# Altium PCB PCB_TX.PcbDoc
Units mm, origin at the board's own origin, x right, y up, seen from the top; angles counter-clockwise.
Board outline 85 x 54.6 mm, 2 copper layers (Top Layer, Bottom Layer); 48 components, 26 nets, 175 pads, 61 vias.
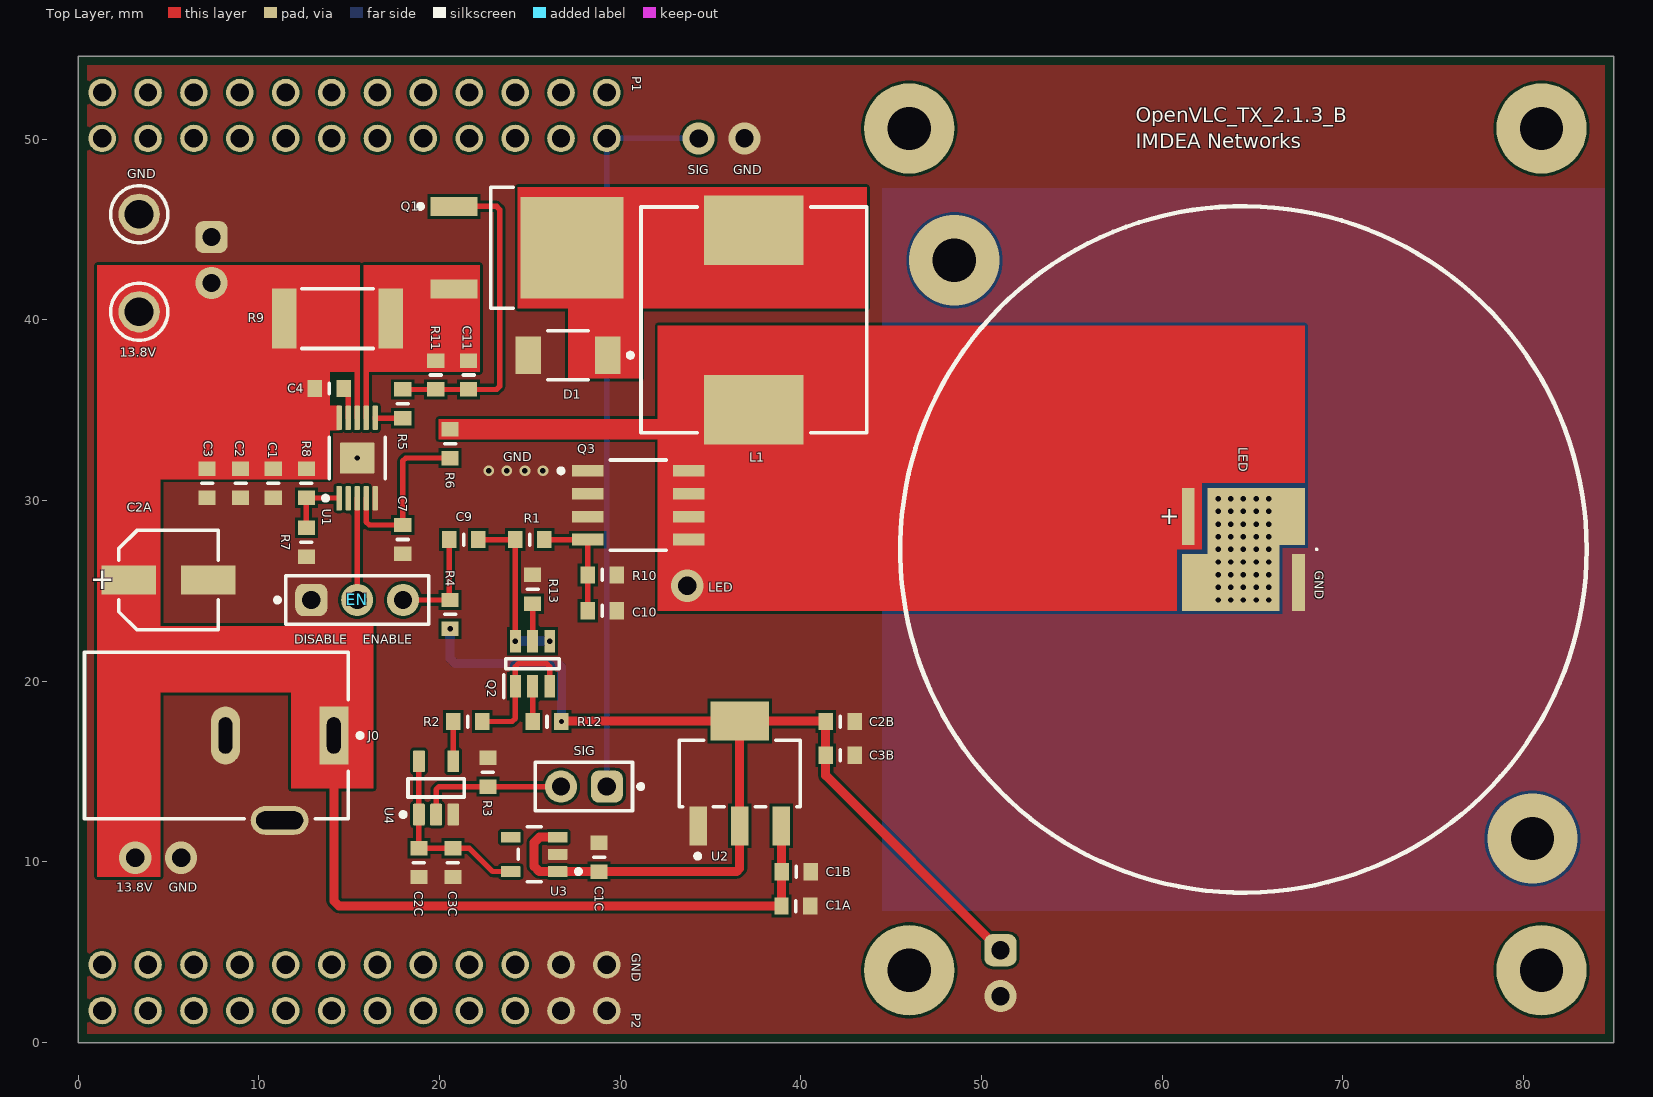
[diagram p0: Top Layer view]
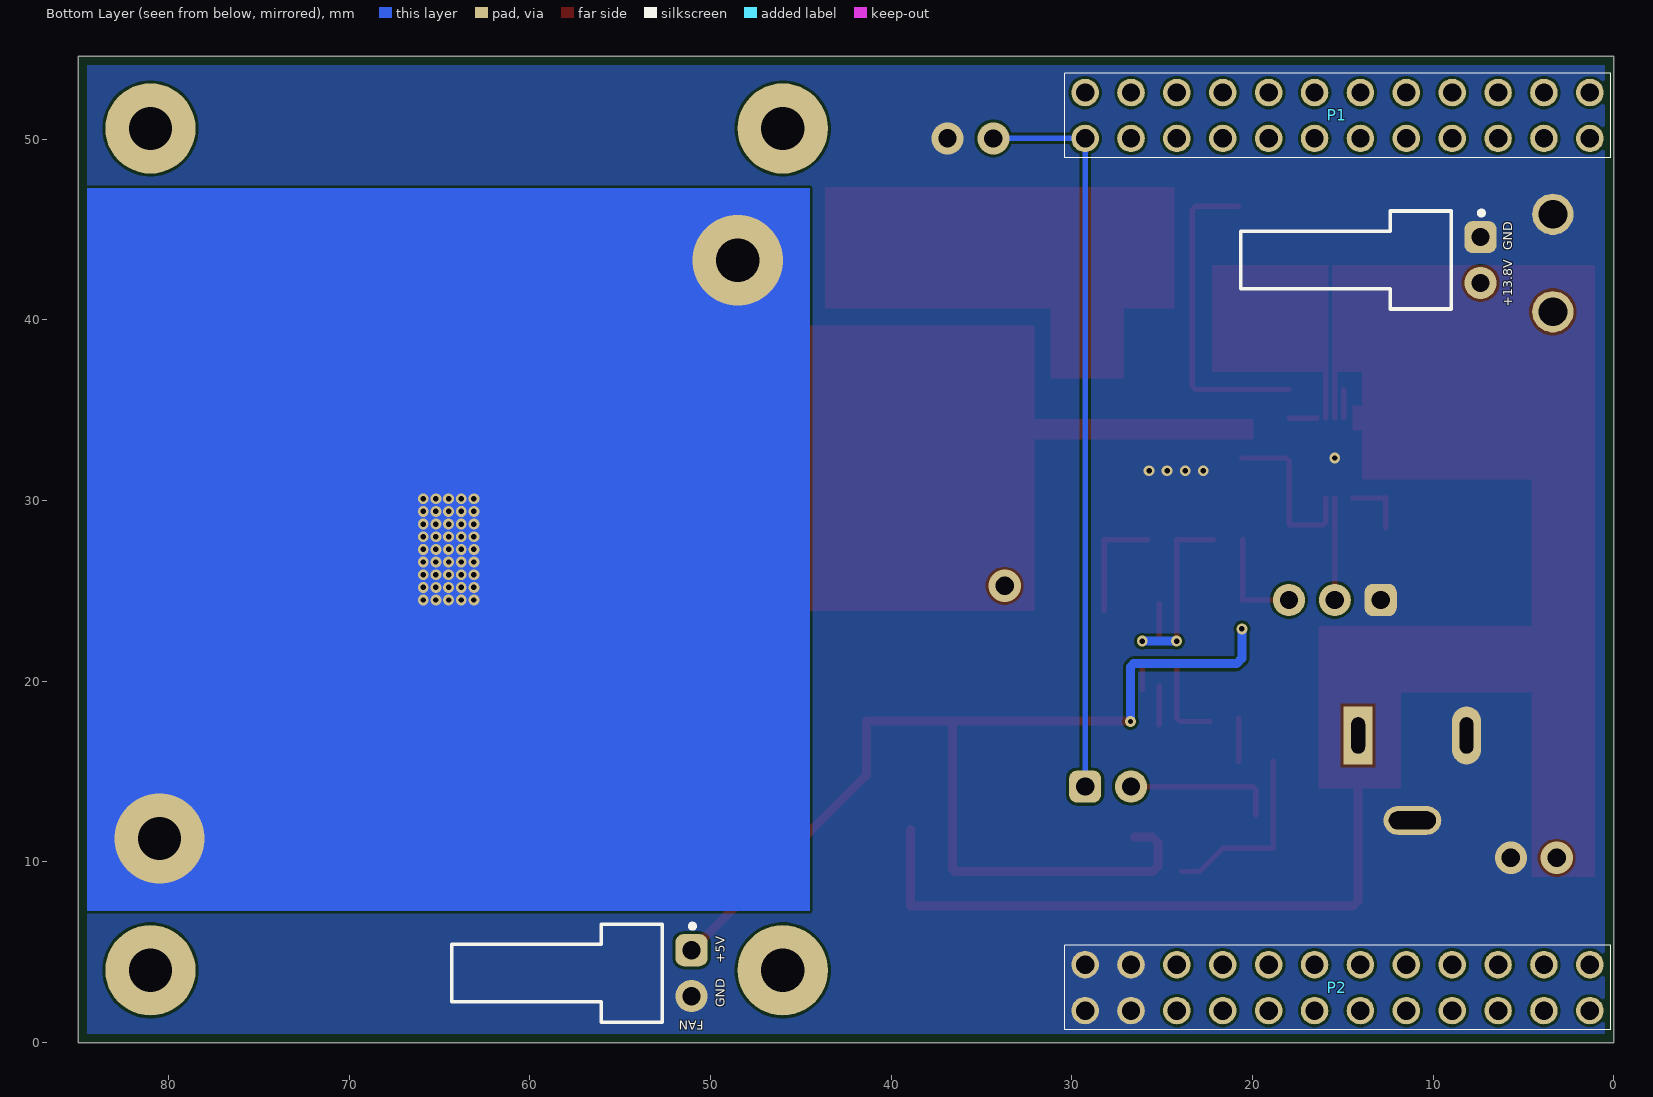
[diagram p1: Bottom Layer view, seen from below]

## Layer stack, top to bottom
Top Solder: solder mask 0.0102, Solder Resist, Dk 3.5
Top Layer: signal copper 0.07
Dielectric1: dielectric 0.32, FR-4, Dk 4.8
Bottom Layer: signal copper 0.07
Bottom Solder: solder mask 0.0102, Solder Resist, Dk 3.5

## Board outline
0,0 0,54.6 85,54.6 85,0

## Design rules (kind name [scope] priority, off if disabled: settings)
Clearance Clearance_1 [(InNet('GND') AND InComponent('DC-DC'))] p1: gap=0.5 ignorepadtopadclearanceinfootprint=FALSE except(0: Arc-Hole Track-Hole SMDPad-Hole THPad-Hole Via-Hole Fill-Hole Poly-Hole Region-Hole Text-Hole)
Clearance [All] p2: gap=0.15 ignorepadtopadclearanceinfootprint=FALSE except(0: Arc-Hole Track-Hole SMDPad-Hole THPad-Hole Via-Hole Fill-Hole Poly-Hole Region-Hole Text-Hole)
DiffPairsRouting [All] p1: maxlimit=0.3 minlimit=0.3 mostfreqgap=0.3 toplayer_minwidth=0.381 toplayer_maxwidth=0.381 toplayer_prefwidth=0.381 bottomlayer_minwidth=0.381 bottomlayer_maxwidth=0.381 bottomlayer_prefwidth=0.381 maxuncoupledlength=12.7
HoleSize [All] p1: absolutevalues=TRUE maxlimit=2.54 minlimit=0.25 maxpercent=80.000 minpercent=20.000
MinimumSolderMaskSliver [All] p1: minsoldermaskwidth=0.15
PlaneClearance [All] p1: clearance=0.5
PlaneConnect [All] p1: planeconnectstyle=Direct reliefexpansion=0.508 reliefentries=4 reliefconductorwidth=0.254 reliefairgap=0.254
PolygonConnect PolygonConnect_1 [IsVia & InNet('GND')] p1: connectstyle=Direct reliefconductorwidth=0.254 reliefentries=4 polygonreliefangle="90 Angle" airgapwidth=0
PolygonConnect [All] p2: connectstyle=Direct reliefconductorwidth=0.254 reliefentries=4 polygonreliefangle="90 Angle" airgapwidth=0.254
RoutingVias [All] p1: holewidth=0.711 width=1.27 viastyle="Through Hole" minholewidth=25 minwidth=0.55 maxholewidth=0.711 maxwidth=1.27
SMDNeckDown [All] p1: percent=80.000
SilkToSilkClearance [All] p1: silktosilkclearance=0.15
SilkToSolderMaskClearance [IsPad] p1: minsilkscreentomaskgap=0.15 clearancetoexposedcopper=TRUE
SolderMaskExpansion [All] p1: expansion=0.102 istentingtop=FALSE
SupplyNets "Schematic Supply Nets_1" [InNet('+13.8V')] p1: voltage=0.000
SupplyNets "Schematic Supply Nets_5" [InNet('+5V')] p2: voltage=0.000
SupplyNets "Schematic Supply Nets_2" [InNet('+3.3V')] p3: voltage=0.000
SupplyNets "Schematic Supply Nets" [InNet('GND')] p4: voltage=0.000
Width [All] p1: maxlimit=0.5 minlimit=0.15 preferedwidth=0.3 minimp=50.000000 maximp=50.000000 favimp=50.000000
23 further rules are at their usual default settings.

## Components (designator, comment, footprint, x,y, rotation, side; value= is the part's Value field where it differs from the comment)
13.8V "5010" KSTN-5010_V 3.376,40.453 r90 top
+13.8V "61900211021" 61900211021 -1255.173,-1226.681 r270 bottom
C1 "GRM188R6YA106MA73D" RESC1608X55N 10.797,30.957 r270 top value=10uF
C1A "GRM188R6YA106MA73D" RESC1608X55N 39.729,7.556 r0 top value=10uF
C1B "GRM188R6YA475KE15D" RESC1608X55N 39.748,9.459 r180 top value=4.7uF
C1C "GRM188R6YA475KE15D" RESC1608X55N 28.833,10.268 r270 top value=4.7uF
C2 "GRM188R6YA475KE15D" RESC1608X55N 8.988,30.957 r270 top value=4.7uF
C2A "EEH-ZL1E820R" WCAP-PSLP_D5H5.5 5,25.6 r180 top
C2B "GRM188R6YA106MA73D" RESC1608X55N 42.173,17.772 r180 top value=10uF
C2C "GRM188R6YA106MA73D" RESC1608X55N 18.858,9.965 r90 top value=10uF
C3 "GCM188R71H104KA57J" RESC1608X55N 7.138,30.957 r270 top value=100nF
C3B "GCM188R71H104KA57J" RESC1608X55N 42.173,15.907 r0 top value=100nF
C3C "GCM188R71H104KA57J" RESC1608X55N 20.743,9.965 r270 top value=100nF
C4 "GCM188D71H105KE36J" RESC1608X55N 13.892,36.207 r0 top value=1uF
C7 "GCM1885C1H471JA16D" RESC1608X55N 17.963,27.85 r270 top value=470pF
C9 "GRM1885C1H102JA01D" RESC1608X55N 21.342,27.842 r0 top value=1nF
C10 "GCM1885C1H471JA16D" RESC1608X55N 29,23.904 r0 top value=470pF
C11 "GCM1885C1H471JA16D" RESC1608X55N 21.607,36.952 r270 top value=470pF
D1 "PMEG3050EP,115" FP-SOD128-MFG 27.113,38.047 r180 top
EN "61300311121" 61300311121 15.442,24.5 r0 top
FAN "61900211021" 61900211021 -1211.5,-1266.156 r270 bottom
GND "5011" KSTN-5011_V 3.376,45.85 r90 top
J0 "PJ-102A" FP-PJ-102A-MFG 7.65,17 r90 top
L1 "SLF12575T-330M3R2-PF" EATN-DR125_V 37.403,40 r270 top
LED "XHP70D-00-0000-0D0BN20E7" XHP70DH000000D0HN20E3_12 64.5,27.3 r180 top
P1 "61302421121" BBB_CAPE_NO_HEADER_R_24 57.204,50.049 r0 bottom
P2 "61302421121" BBB_CAPE_NO_HEADER_R_24 57.205,1.771 r0 bottom
Q1 "ZXMP7A17KTC" DIOD-TO252-3_V 24.842,44 r0 top
Q2 "FDC6333C" SOT95P275X110-6N 25.15,20.972 r90 top
Q3 "DMT67M8LSS-13" FP-751EB-MFG 31,29.747 r0 top
R1 "RT0603BRD0710RL" RESC1608X55N 25,27.842 r180 top value=10
R2 "RT0603BRD071RL" RESC1608X55N 21.558,17.772 r180 top value=1
R3 "RT0603BRD0710KL" RESC1608X55N 22.679,14.972 r90 top value=10k
R4 "RT0603BRD07100RL" RESC1608X55N 20.582,23.7 r270 top value=100
R5 "RT0603BRD071RL" RESC1608X55N 17.963,35.352 r270 top value=1
R6 "RT0603BRD073K9L" RESC1608X55N 20.582,33.157 r90 top value=3900
R7 "RT0603BRD0716K5L" RESC1608X55N 12.634,27.688 r270 top value=16.5k
R8 "RT0603BRD0749K9L" RESC1608X55N 12.634,30.957 r270 top value=49.9k
R9 "CRA2512-FZ-R075ELF" FP-CSRN2512-IPC_B 14.349,40.075 r0 top
R10 "RT0603BRD0710KL" RESC1608X55N 29,25.886 r0 top value=10k
R11 "RT0603BRD0710KL" RESC1608X55N 19.79,36.952 r270 top value=10k
R12 "RT0603BRD0710RL" RESC1608X55N 25.95,17.772 r0 top value=10
R13 "RT0603BRD0710RL" RESC1608X55N 25.15,25.086 r90 top value=10
SIG "61300211121" 61300211121 27.995,14.172 r180 top
U1 "LM3409QMY/NOPB" DGQ0010A_N 15.442,32.357 r90 top
U2 "TLV76150DCYR" FP-DCY0004A-MFG 36.618,14.896 r90 top
U3 "TPS7A2433DBVR" FP-DBV0005A-MFG 25.241,10.418 r180 top
U4 "SN74AHC1G126DBVR" DBV0005A_M 19.808,14.096 r90 top

## Footprints (in the part's own frame and the unit in brackets; to place one, negate y for a bottom-side part, rotate by r counter-clockwise, add the part's x,y. Pads: shape width x height; smd on the part's side, far side on the other; paste and mask are expansions set on the pad)
61300211121 [mil] "Pin Header, pitch 2.54 mm, THT, Vertical, single row, 2p"
  rrect50% 70x70 hole 40: 1(-50,0)
  round 70 hole 40: 2(50,0)
  silkscreen extent -129,-53 106,53, body extent -100,-50 100,50, height 337
61300311121 [mil] "Pin Header, pitch 2.54 mm, THT, Vertical, single row, 3p"
  rrect50% 70x70 hole 40: 1(-100,0)
  round 70 hole 40: 2(0,0) 3(100,0)
  silkscreen extent -179,-53 156,53, body extent -150,-50 150,50, height 337
61900211021 [mil] "2.54mm Male Left Angled Header Bottom Locking, 2p"
  rrect50% 70x70 hole 40: 1(-50050,-49706.69)
  round 70 hole 40: 2(-49950,-49706.69)
  silkscreen extent -50107,-50229 -49893,-49700, body extent -50100,-50226 -49900,-49694, height 230
BBB_CAPE_NO_HEADER_R_24 [mil] "46-pin male header for BeagleBone Black P8,P9"
  round 60 hole 40: 23(-1100,0) 24(-1100,-100) 25(-1200,0) 26(-1200,-100) 27(-1300,0) 28(-1300,-100) 29(-1400,0) 30(-1400,-100) 31(-1500,0) 32(-1500,-100) 33(-1600,0) 34(-1600,-100) 35(-1700,0) 36(-1700,-100) 37(-1800,0) 38(-1800,-100) 39(-1900,0) 40(-1900,-100) 41(-2000,0) 42(-2000,-100) 43(-2100,0) 44(-2100,-100) 45(-2200,0) 46(-2200,-100)
  silkscreen extent -2246,-142 -1056,42
DBV0005A_M [mm] "SOT23, 5-Leads, Body 3.05x1.75mm, Pitch 0.95mm, IPC Low Density"
  rrect15% 1.2x0.65 smd: 1(-1.475,0.95) 2(-1.475,0) 3(-1.475,-0.95) 4(1.475,-0.95) 5(1.475,0.95)
  silkscreen extent -1.6,-1.55 0.5,1.95, body extent -1.42,-1.46 1.42,1.46, height 1.08
DGQ0010A_N [mm] "TSOP, 10-Leads, Body 3.1x3.1mm, Pitch 0.5mm, Thermal Pad 1.9x1.73mm, IPC Medium Density"
  rrect33% 1.35x0.3 smd: 1(-2.225,1) 2(-2.225,0.5) 3(-2.225,0) 4(-2.225,-0.5) 5(-2.225,-1) 6(2.225,-1) 7(2.225,-0.5) 8(2.225,0) 9(2.225,0.5) 10(2.225,1)
  rrect6% 1.73x1.9 smd: 11(0,0)
  silkscreen extent -2.35,-1.55 1.15,1.87, body extent -2.45,-1.5 2.45,1.5, height 0.94
DIOD-TO252-3_V [mm] "DPAK, 3-Leads, Body 6.7x6.2mm, Pitch 2.286mm"
  rect 2.6x1.06 smd: 1(-4.05,2.286) 2(-4.05,-2.286)
  rect 5.7x5.632 smd: 3(2.5,0)
  silkscreen extent -6.02,-3.35 -0.75,3.35, body extent -4.63,-3.35 5.28,3.35, height 2.39
EATN-DR125_V [mm] "SMD, 2-Leads, Body 12.5x12.5mm"
  rect 3.85x5.5 smd: 1(-4.975,0) 2(4.975,0)
  silkscreen extent -6.25,-6.25 6.25,6.25, body extent -6.25,-6.25 6.25,6.25, height 6
FP-751EB-MFG [mm]
  rect 1.75x0.65 smd paste+0 mask+0: 1(-2.8,1.905) 2(-2.8,0.635) 3(-2.8,-0.635) 4(-2.8,-1.905) 5(2.8,-1.905) 6(2.8,-0.635) 7(2.8,0.635) 8(2.8,1.905)
  silkscreen extent -4.4,-2.5 1.55,2.5, body extent -3.77,-2.6 3.77,2.6, height 0.25
FP-CSRN2512-IPC_B [mm]
  rect 1.355x3.308 smd paste+0 mask+0: 1(-2.951,0) 2(2.951,0)
  silkscreen extent -1.97,-1.65 1.97,1.65, body extent -3.88,-1.9 3.88,1.9, height 0.25
FP-DBV0005A-MFG [mm]
  rrect17% 1.1x0.6 smd paste+0 mask+0: 1(-1.3,0.95) 2(-1.3,0) 3(-1.3,-0.95) 4(1.3,-0.95) 5(1.3,0.95)
  silkscreen extent -2.58,-1.53 0.87,1.53, body extent -1.95,-1.78 1.95,1.78, height 0.25
FP-DCY0004A-MFG [mm]
  rect 2.15x0.95 smd paste+0 mask+0: 1(-2.9,2.3) 2(-2.9,0) 3(-2.9,-2.3)
  rect 2.15x3.25 smd paste+0 mask+0: 4(2.9,0)
  silkscreen extent -4.7,-3.35 1.85,3.35, body extent -4.08,-3.45 4.08,3.45, height 0.25
FP-PJ-102A-MFG [mm]
  rect 3.2x1.6 hole 0.762 slot 2 at 0 deg paste-2539.97 mask+0: 1(0,-6.5)
  rrect100% 3.2x1.6 hole 0.762 slot 2 at 0 deg paste-2539.97 mask+0: 2(0,-0.5)
  rrect100% 1.6x3.2 hole 2.6 slot 1 at 0 deg paste-2539.97 mask+0: 3(-4.7,-3.5)
  silkscreen extent -4.6,-8.08 4.6,7.3, body extent -5.6,-7.4 4.7,7.4, height 0.25
FP-SOD128-MFG [mm]
  rect 1.4x2.1 smd paste-1000 mask+0: 1(-2.2,0) 2(2.2,0)
  silkscreen extent -3.58,-1.35 1.12,1.35, body extent -3.1,-1.7 3.1,1.7, height 0.25
KSTN-5010_V [mil] "Test Point, Dia 3.17mm"
  round 90 hole 62.99: 1(0,0)
  silkscreen extent -62,-62 62,62, body extent -62,-62 63,63, height 320
KSTN-5011_V [mil] "Test Point, Dia 3.17mm"
  round 90 hole 62.99: 1(0,0)
  silkscreen extent -62,-62 62,62, body extent -62,-62 63,63, height 320
RESC1608X55N [mm]
  rect 0.8x0.95 smd: 1(-0.8,0) 2(0.8,0)
  silkscreen extent 0,-0.3 0,0.3
SOT95P275X110-6N [mm]
  rect 1.25x0.6 smd: 1(-1.25,0.95) 2(-1.25,0) 3(-1.25,-0.95) 4(1.25,-0.95) 5(1.25,0) 6(1.25,0.95)
  silkscreen extent -1.88,-1.48 0.28,1.6
WCAP-PSLP_D5H5.5 [mm] "Aluminum Polymer Capacitors, body diameter 5mm"
  rect 3x1.6 smd: 1(2.2,0) 2(-2.2,0)
  silkscreen extent -2.75,-2.75 2.75,2.75, body extent -3,-2.65 3,2.65, height 5.5
XHP70DH000000D0HN20E3_12 [mm]
  rect 0.7x3.15 smd: 1(-3.048,1.83) 2(3.048,-1.83)
  rect 1.5x3.15 smd: 3(-2.648,-1.825) 3(2.648,1.825)
  rect 4x6.8 smd: 3(0,0)
  silkscreen extent -4.1,-0.05 -4,0.05

## Part data
13.8V: library part CMP-1672-00002-4, "Test Point, Red, Through Hole, RoHS, Bulk", Colour=Red, Manufacturer=Keystone, Package Quantity=100, ComponentLink1Description="Manufacturer URL", ComponentLink1URL=http://www.keyelco.com/, ComponentLink2Description=Datasheet, ComponentLink2URL=http://www.keyelco.com/product-pdf.cfm?p=1319, Contact Material=Bronze, Contact Plating=Silver, DatasheetVersion="Rev. F, 12/2013", Height="8.12 mm", Mount="Through Hole", Mounting Technology="Through Hole", PackageDescription="1-Pin Through Hole Device, Dia 3.17 mm", PackageReference=5010, Packaging=Bulk, Pins=1, REACH SVHC="No SVHC", RoHSCompliant=true
+13.8V FAN: library part CMP-1502-00592-2, Color=Beige, Contact Resistance=20mΩ, Current Rating=3A, Flammability Rating="UL94 V-0", Insulation Resistance=1GΩ, Max Operating Temperature=105°C, Min Operating Temperature=-40°C, Operating Supply Voltage=250V, Connector Type="Male Pin", Contact Gender=Male, Contact Material=Copper, Contact Mating Length=7.62mm, Contact Plating=Tin, Fastening Type=Friction, Gender=Male, Height=3.2mm, Housing Material=Nylon, Insulation=Insulated, Lead Pitch=2.54mm, Length=5.08mm, Mount="Through Hole", NexarPartId=18818217, Number of Contacts=2, Number of Pins=2, Number of Positions=2, Number of Rows=1, Packaging=Bulk, Pitch=2.54mm, REACH SVHC=Unknown, RoHS=Compliant, Termination="Through Hole", Voltage Rating=250V, Width=5.12mm
C1 C1A C1B C1C C2 C2B C2C C3 C3B C3C C4 C7 C9 C10 C11: library part Cap, "Capacitor", LatestRevisionDate=17-Jul-2002, LatestRevisionNote="Re-released for DXP Platform.", PackageDescription="Radial Cap, Thru-Hole; 2 Leads; 0.3 in Pin Spacing", PackageReference=RAD-0.3, Published=8-Jun-2000, Publisher="Altium Limited"
C2A: library part CMP-03913-53758736-1, "875105242006 WCAP-PSLP Aluminum Polymer Capacitors", Capacitance=47µF, Case/Package=Radial, ESR (Equivalent Series Resistance)=30mΩ, Leakage Current=300µA, Max Operating Temperature=105°C, Min Operating Temperature=-55°C, Ripple Current=1.97A, Tolerance=20%, Voltage Rating=10V, Diameter=5mm, Height - Seated (Max)=5.5118mm, Length=5.5mm, Life (Hours)=2000hours, Mount="Surface Mount", NexarPartId=53758736, Packaging="Tape & Reel (TR)", Pitch=5.3mm, Polarity=Polar, REACH SVHC=Unknown, RoHS=Compliant, Voltage Rating (DC)=10V
D1: library part CMP-14398-000051-1, "DIODE SCHOTTKY 30V 5A SOD128", RoHS Compliant=Yes
EN: library part CMP-1502-01062-3, Color=Black, Contact Resistance=20mΩ, Current Rating=3A, Max Operating Temperature=105°C, Min Operating Temperature=-40°C, Operating Supply Voltage=250V, Connector Type="Male Pin", Contact Material=Copper, Contact Mating Length=5.9944mm, Contact Plating=Gold, Gender=Male, Height=8.94mm, Lead Free="Lead Free", Lead Pitch=2.54mm, Mount="Through Hole", NexarPartId=32855521, Number of Contacts=3, Number of Pins=3, Number of Positions=3, Number of Rows=1, Orientation=Vertical, Packaging=Bulk, Pitch=2.54mm, REACH SVHC=Unknown, RoHS=Compliant, Termination=Solder, Voltage Rating=250V
GND: library part CMP-1672-00003-4, "Test Point, Black, Through Hole, RoHS, Bulk", Colour=Black, Manufacturer=Keystone, Package Quantity=100, ComponentLink1Description="Manufacturer URL", ComponentLink1URL=http://www.keyelco.com/, ComponentLink2Description=Datasheet, ComponentLink2URL=http://www.keyelco.com/product-pdf.cfm?p=1320, Contact Material=Bronze, Contact Plating=Silver, DatasheetVersion="Rev. F, 12/2013", Height="8.12 mm", Mount="Through Hole", Mounting Technology="Through Hole", PackageDescription="1-Pin Through Hole Device, Dia 3.17 mm", PackageReference=5011, Packaging=Bulk, Pins=1, REACH SVHC="No SVHC", RoHSCompliant=true
J0: library part CMP-12637-106234071-1, "PJ-102A 2.0 x 6.5 mm, 2.5 A, Horizontal, Through Hole, Tapered Pins, Dc Power Jack Connector", Color=Black, Current Rating=2.5A, Flammability Rating="UL94 V-0", Insulation Resistance=50MΩ, Max Operating Temperature=85°C, Min Operating Temperature=-25°C, Voltage Rating=24V, Contact Gender=Male, Contact Material="Copper, Nickel, Tin", Contact Plating=Nickel, Diameter=2.1mm, Gender=Male, Height=11.2mm, Housing Color=Black, Housing Material=Thermoplastic, Inside Diameter=2mm, Lead Free="Lead Free", Lifecycle Status=Production, Mount="Through Hole", NexarPartId=106234071, Number of Conductors=2, Number of Contacts=3, Orientation=Horizontal, Outside Diameter=6.5mm, Packaging=Bulk, RoHS=Compliant, Schedule B="8536695050, 8536695050", Shielding=No, Termination="Through Hole", Voltage Rating (DC)=24V
L1: library part CMP-2000-06178-1, "High Power Density, High Efficiency, Shielded Inductor, 100 uH, 1.78 A, -40 to 125 degC, 2-Pin SMD, RoHS, Tape and Reel", Case Size/Dimension=12.5x12.5x6mm, DC Resistance=0.17O, Inductance-Nom=100µH, Manufacturer=EATON, Package Description="2-Pin Surface Mount Device, Body 12.5 x 12.5 mm", Package Reference=DR125, Rated Current-Max=1.78A, Tolerance (%)=±20%, Datasheet URL=https://ciiva.com/datasheet-click-3083294?src=ciiva&sig=4634c5cd, Datasheet Version=04/2014, Manufacturer URL=http://www.eaton.com/, Mounting Technology=SurfaceMount, Shielding=Yes
LED: library part XHP70D-H0-0000-0D0HN20E3, "High Power LEDs - White White 5000 K 80-CRI, XLamp XHP70D", Manufacturer_Name="CREE LED", Mouser Part Number=941-XHP70DH0D0HN20E3, Arrow Part Number=XHP70D-H0-0000-0D0HN20E3, Arrow Price/Stock=https://www.arrow.com/en/products/xhp70d-h0-0000-0d0hn20e3/cree-led?region=nac, Datasheet Link=https://www.mouser.in/datasheet/2/723/ds_XHP70_3-2399964.pdf, Geometry.Height=4.62mm, Manufacturer_Part_Number=XHP70D-H0-0000-0D0HN20E3, Mouser Price/Stock=https://www.mouser.co.uk/ProductDetail/Cree-LED/XHP70D-H0-0000-0D0HN20E3?qs=doiCPypUmgHnzoljhPHltw%3D%3D
P1: library part BBB_P8_reduced
P2: library part BBB_P9_reduced
Q1: library part CMP-1668-00001-5, "P-Channel Enhancement Mode MOSFET, -100 V, -3.8 A, -55 to 150 degC, 3-Pin DPAK (TO252), RoHS, Tape and Reel", Manufacturer="Diodes Inc", Max Operating Temperature="150 degC", Min Operating Temperature="-55 degC", Package Quantity=2500, ComponentLink1Description="Manufacturer URL", ComponentLink1URL=http://www.diodes.com/, ComponentLink2Description=Datasheet, ComponentLink2URL=http://www.diodes.com/_files/datasheets/ZXMP10A18K.pdf, DatasheetVersion="Rev. 2-2, 08/2014", Height="2.39 mm", Length="6.73 mm", Mount="Surface Mount", Mounting Technology="Surface Mount", PackageDescription="3-Pin Transistor Outline, Body 6.1 x 6.575 mm, Pitch 2.286 mm", PackageReference=TO252-3, Packaging="Tape and Reel", Pins=3, REACH SVHC="No SVHC", RoHSCompliant=true
Q2: "High performance trench technology for extremely low RDS(ON); Q2 2.0 A, 30V.; Low gate charge ; Q1 2.5 A, 30V; RDS(on) = 150 m @ VGS = 4.5 V; RDS(on) = 95 m@ VGS = 10 V; RDS(on) = 220 m @ VGS = -4.5 V; SuperSOT 6 package: small footprint (72% smaller thanSO-8); low profile (1mm thick).; RDS(on) = 150 m@ VGS = -10 V", Manufacturer_Name=onsemi, Mouser Part Number=512-FDC6333C, Arrow Part Number=FDC6333C, Arrow Price/Stock=https://www.arrow.com/en/products/fdc6333c/on-semiconductor, Datasheet Link=https://www.onsemi.com/pub/Collateral/FDC6333C-D.PDF, Geometry.Height=1.1mm, Manufacturer_Part_Number=FDC6333C, Mouser Price/Stock=https://www.mouser.co.uk/ProductDetail/onsemi-Fairchild/FDC6333C?qs=UMEuL5FsraAupx2e21YLSQ%3D%3D
Q3: library part CMP-00278-87654981-1, "FDS2672-F085 Trans MOSFET N-CH 200V 3.9A Automotive 8-Pin SOIC T/R", Case/Package=SOIC, Continuous Drain Current (ID)=3.9A, Drain To Source Breakdown Voltage=200V, Drain To Source Resistance=59mΩ, Gate to Source Voltage (Vgs)=20V, Input Capacitance=2.535nF, Manufacturer Lifecycle Status="LAST SHIPMENTS", Max Junction Temperature (Tj)=150°C, Max Power Dissipation=1W, Min Operating Temperature=-55°C, Power Dissipation=2.5W, Drain to Source Voltage (Vdss)=200V, Element Configuration=Single, Fall Time=10ns, Height=1.75mm, Lifecycle Status=EOL, Max Operating Temperature=150°C, Mount="Surface Mount", NexarPartId=87654981, Number of Channels=1, Number of Pins=8, Packaging="Cut Tape (CT)", Radiation Hardening=No, Rds On Max=70mΩ, Rise Time=10ns, RoHS=Compliant, Turn-Off Delay Time=35ns, Turn-On Delay Time=22ns, Weight=230.4mg
R1 R2 R3 R4 R5 R6 R7 R8 R10 R11 R12 R13: library part Res1, "Resistor", LatestRevisionDate=17-Jul-2002, LatestRevisionNote="Re-released for DXP Platform.", PackageDescription="Axial Device, Thru-Hole; 2 Leads; 0.3 in Pin Spacing", PackageReference=AXIAL-0.3, Published=8-Jun-2000, Publisher="Altium Limited"
R9: library part CMP-26527-004947-1, "Res Thick Film 2512 0.1Ω 1% 2W ±200ppm/°C Molded SMD Plastic T/R", Case Code (Imperial)=2512, Case Code (Metric)=6432, Max Operating Temperature=155°C, Max Power Dissipation=2W, Min Operating Temperature=-55°C, Resistance=100mR, Resistor Type="Thick Film", Temperature Coefficient=200ppm/°C, Tolerance=1%, Case/Package=2512, Contact Plating=Tin, Height=0.028inch, Length=0.25inch, Mount="Surface Mount", Number of Terminations=2, Packaging="Tape and Reel", Power Rating=2W, Radiation Hardening=No, RoHS Compliant=Yes, Series=CSRN, Width=0.124inch
SIG: library part CMP-1712-00002-6, Color=Black, Contact Resistance=20mΩ, Current Rating=3A, Max Operating Temperature=125°C, Min Operating Temperature=-40°C, Operating Supply Voltage=250V, Connector Type="Male Pin", Contact Gender=Male, Contact Material=Copper, Contact Mating Length=5.9944mm, Contact Plating=Gold, Gender=Male, Height=8.94mm, Housing Material=PBT, Lead Free="Lead Free", Lead Pitch=2.54mm, Mount="Through Hole", NexarPartId=20081794, Number of Contacts=2, Number of Pins=2, Number of Positions=2, Number of Rows=1, Orientation=Vertical, Packaging=Bulk, Pitch=2.54mm, REACH SVHC="No SVHC", RoHS=Compliant, Termination="Through Hole", Voltage Rating=250V
U1: library part CMP-0063-01360-3, "PFET Buck Controller for High Power LED Drives, 10-pin eMSOP, Pb-Free", Manufacturer="Texas Instruments", PackageTopMarking=ZXTT*SZDB, PowerWise=N, Code_JEDEC=MO-187-BAT, ComponentLink1Description="Datasheet URL", ComponentLink1URL=http://www.ti.com/general/docs/lit/getliterature.tsp?genericPartNumber=LM3409-Q1&fileType=pdf, CompType=MiscPower, PackageDescription="Molded Mini-SO, Exposed Pad .118 x .118 x .034in Body, 10 Lead, .0197in Pitch", PackageReference=DGQ0010A, PinCount=10, RoHS=Y
U2: library part CMP-00370-134324849-1, "TLV76150DCYR 1-A 16-V high-PSRR linear voltage regulator 4-SOT-223 -40 to 125", Case/Package=SOT-223, Dropout Voltage=900mV, Manufacturer Lifecycle Status=ACTIVE, Max Junction Temperature (Tj)=125°C, Max Supply Voltage=16V, Min Operating Temperature=-40°C, Min Supply Voltage=6.5V, Nominal Supply Current=65µA, Output Current=1A, Output Voltage=5V, Accuracy=1%, Height=1.8mm, Length=6.5mm, Lifecycle Status=Production, Max Operating Temperature=125°C, NexarPartId=134324849, Number of Channels=1, Number of Outputs=1, Number of Pins=4, Thickness=1.6mm, Width=3.5mm
U3: library part CMP-00370-106221451-1, "TPS7A2433DBVR 200-mA, 18-V, ultra-low-IQ, low-dropout (LDO) voltage regulator with enable ; 5-SOT-23 -40 to 125", Case/Package=SOT-23, Manufacturer Lifecycle Status=ACTIVE, Output Voltage=3.3V, Height=1.45mm, Length=2.9mm, Lifecycle Status=Production, NexarPartId=106221451, Number of Channels=1, Number of Pins=5, Thickness=1.2mm, Width=1.6mm
U4: library part CMP-0859-00139-3, "Single Bus Buffer Gate With 3-State Outputs, DBV0005A, LARGE T&R", F @ Nom Voltage(Max)(Mhz)=75, Generic Part Number=SN74AHC1G126, ICC @ Nom Voltage(Max)(mA)=0.01, Manufacturer="Texas Instruments", Operating Temperature Range(C)="-40 to 125,-40 to 85", Rating=Catalog, tpd @ Nom Voltage(Max)(ns)=11.5,7.5, Voltage(Nom)(V)=3.3,5, 3-State Output=Yes, Bits(#)=1, DatasheetVersion=SCLS379K, Input Type=CMOS, Logic=True, Output Drive (IOL/IOH)(Max)(mA)=50/-50, Output Type=CMOS, PackageReference=DBV0005A, Schmitt Trigger=No, Sub-Family="Non-Inverting Buffer/Driver", Technology Family=AHC, VCC(Max)(V)=5.5, VCC(Min)(V)=2

## Free pads (board coordinates)
  round 5 hole 2.4: 3(46,4) 3(46,50.6) 3(81,4) 3(81,50.6)

## Via types
v1: diameter 0.6, hole 0.3, Top Layer to Bottom Layer, 54 vias
v2: diameter 1.778, hole 1.016, Top Layer to Bottom Layer, 5 vias
v3: diameter 5, hole 2.4, Top Layer to Bottom Layer, 2 vias

## Nets (pads, with @x,y where several pads share a name; then routed paths per layer and width w, separated by ;. In a path a pad name is that pad's centre, name@x,y a point inside that pad or via, vN(x,y) a via of type N, cw(c..) or ccw(c..) an arc to the next point about the centre after c; other vN are vias at no path point)
+3.3V: C2C.2 C3C.1 U3.5 U4.1 U4.5 | length 10.4
  Top Layer w0.3: U4.5 U4.1 C2C.2 21.636,10.765 22.933,9.468 U3.5
+5V: C1C.2 C2B.2 C3B.1 FAN.1 R4.2 R12.2 U2.2 U2.4 U3.1 U3.3 | length 64.7
  Top Layer w0.5: U3.3 25.534,11.368 25.241,11.075 25.241,9.761 25.534,9.468 C1C.2 36.442,9.468 36.618,9.644 U2.2 U2.4 ; R12.2@26.774,17.796 U2.4 ; C2B.2@41.349,17.796 U2.4 ; C2B.2 41.373,14.791 FAN.1
  Bottom Layer w0.5: v1(20.582,22.9) 20.582,21.265 20.875,20.972 26.574,20.972 26.75,20.796 v1(26.75,17.772)
+13.8V: 13.8V.1 +13.8V.2 C1.1 C1A.1 C1B.2 C2.1 C2A.1 C3.1 C4.1 J0.1 R8.1 R9.1 U1.8 U1.10 U2.3 | length 41.1
  Top Layer w0.3: U1.8 15.442,37.431
  Top Layer w0.5: J0.1 14.15,7.849 14.443,7.556 C1A.1 38.929,9.459 U2.3@38.929,11.801
  other v2: 3.16,10.229
CS_PD: P2.37
GND: +13.8V.1 C1.2 C1A.2 C1B.1 C1C.1 C2.2 C2A.2 C2B.1 C2C.1 C3.2 C3B.2 C3C.2 C7.2 C10.2 D1.2 EN.1 FAN.2 GND.1 J0.2 J0.3 LED.1 P2.23 P2.24 P2.25 P2.26 Q3.1 Q3.2 Q3.3 R3.2 R7.2 R10.2 R13.2 U1.5 U1.11 U2.1 U3.2 U4.3
  other v1: 22.725,31.652 23.725,31.652 24.725,31.652 25.725,31.652 15.442,32.357
  other v2: 5.7,10.229 36.884,50.049
HeatSink: LED.3
  other v1: 63.1,24.5 63.8,24.5 64.5,24.5 65.2,24.5 65.9,24.5 63.1,25.2 63.8,25.2 64.5,25.2 65.2,25.2 65.9,25.2 63.1,25.9 63.8,25.9 64.5,25.9 65.2,25.9 65.9,25.9 63.1,26.6 63.8,26.6 64.5,26.6 65.2,26.6 65.9,26.6 63.1,27.3 63.8,27.3 64.5,27.3 65.2,27.3 65.9,27.3 63.1,28 63.8,28 64.5,28 65.2,28 65.9,28 63.1,28.7 63.8,28.7 64.5,28.7 65.2,28.7 65.9,28.7 63.1,29.4 63.8,29.4 64.5,29.4 65.2,29.4 65.9,29.4 63.1,30.1 63.8,30.1 64.5,30.1 65.2,30.1 65.9,30.1
  other v3: 80.5,11.3 48.5,43.3
LED: L1.2 LED.2 Q3.5 Q3.6 Q3.7 Q3.8 R6.2
  other v2: 33.714,25.286
MISO_PD: P2.40
MOSI_PD: P2.42
NetC4_2: C4.2 U1.9 | length 1.6
  Top Layer w0.3: U1.9 C4.2@14.942,36.148
NetC7_1: C7.1 R6.1 U1.4 | length 9.6
  Top Layer w0.3: U1.4 15.942,28.826 16.118,28.65 C7.1 17.963,32.181 18.139,32.357 R6.1
NetC9_1: C9.1 EN.3 R4.1 | length 6
  Top Layer w0.3: EN.3@17.982,24.396 EN.3@17.987,24.401 ; EN.3 R4.1 20.542,24.541 C9.1
NetC9_2: C9.2 Q2.4 Q2.6 R1.2 | length 9.6
  Top Layer w0.3: C9.2 R1.2 v1(24.2,22.222)
  Bottom Layer w0.5: v1(24.2,22.222) v1(26.1,22.222)
NetC10_1: C10.1 Q3.4 R1.1 R10.1 | length 6.3
  Top Layer w0.3: R1.1 Q3.4 C10.1
NetC11_1: C11.1 Q1.2 R9.2 R11.1 U1.7 | length 5.6
  Top Layer w0.3: U1.7 15.942,40.162
NetC11_2: C11.2 Q1.1 R5.1 R11.2 | length 17.8
  Top Layer w0.3: R5.1 R11.2 C11.2 23.156,36.152 23.332,36.328 23.332,46.11 23.156,46.286 Q1.1
NetD1_1: D1.1 L1.1 Q1.3
NetEN_2: EN.2 U1.3 | length 5.7
  Top Layer w0.3: EN.2@15.442,24.396 EN.2 U1.3
NetQ2_1: Q2.1 Q2.3 R2.1 | length 8.1
  Top Layer w0.3: R2.1 24.024,17.772 24.2,17.948 24.2,20.796 24.376,20.972 25.924,20.972 26.1,20.796 Q2.3@26.1,19.551
NetQ2_2: Q2.2 R12.1 | length 2.1
  Top Layer w0.3: R12.1@25.15,17.601 Q2.2
NetQ2_5: Q2.5 R13.1 | length 2.1
  Top Layer w0.3: Q2.5 R13.1
NetR2_2: R2.2 U4.4 | length 2.4
  Top Layer w0.3: U4.4 R2.2@20.758,17.961
NetR3_1: R3.1 SIG.2 U4.2 | length 8.4
  Top Layer w0.3: U4.2 19.808,13.997 19.984,14.172 R3.1 SIG.2
NetR5_2: R5.2 U1.6 | length 1.6
  Top Layer w0.3: U1.6 16.442,34.552 R5.2
NetR7_1: R7.1 R8.2 U1.1 | length 3.5
  Top Layer w0.3: R7.1 R8.2@12.634,30.146 ; R8.2 R8.2@12.634,30.146 ; U1.1 14.442,30.146 R8.2@12.634,30.146
P8_45: P1.23 SIG.1 | length 41
  Bottom Layer w0.3: SIG.1 29.264,50.048 v2@34.344,50.048
  other v2: 34.344,50.048
pads on no net: P1.24 P1.25 P1.26 P1.27 P1.28 P1.29 P1.30 P1.31 P1.32 P1.33 P1.34 P1.35 P1.36 P1.37 P1.38 P1.39 P1.40 P1.41 P1.42 P1.43 P1.44 P1.45 P1.46 P2.27 P2.28 P2.29 P2.30 P2.31 P2.32 P2.33 P2.34 P2.35 P2.36 P2.38 P2.39 P2.41 P2.43 P2.44 P2.45 P2.46 U1.2 U3.4

## Polygon pours and split planes (outlines as drawn)
GND on Bottom Layer "GND_L02_P017" (solid, pour order 17): 0.5,0.5 0.5,54.1 84.5,54.1 84.5,0.5
GND on Top Layer "GND_L01_P018" (solid, pour order 18): 0.5,0.5 0.5,54.1 84.5,54.1 84.5,0.5
GND on Bottom Solder "HeatSink" (solid): 44.5,47.3 84.5,47.3 84.5,7.3 44.5,7.3

## Other copper
Top Layer:
  region net LED: 32.093,39.684 67.886,39.684 67.886,30.99 32.093,30.99
  region net LED: 32.093,28 60.821,28 60.821,23.912 32.093,23.912
  region net +13.8V: 1.05,9.174 1.05,43.021 4.55,43.021 4.55,9.174
  region net +13.8V: 1.05,31.196 1.05,43.021 13.918,43.021 13.918,31.196
  region net NetD1_1: 24.342,47.35 43.653,47.35 43.653,40.65 24.342,40.65
  region net NetC11_1: 15.792,37.13 15.792,43.021 22.232,43.021 22.232,37.13
  region net +13.8V: 12.442,33.908 12.442,35.257 14.442,35.257 14.442,33.908
  region net +13.8V: 11.861,37.13 11.861,43.021 15.592,43.021 15.592,37.13
  region net LED: 19.957,34.507 34.253,34.507 34.253,33.407 19.957,33.407
  region net +13.8V: 11.861,31.196 11.861,39.861 13.918,39.861 13.918,31.196
  region net NetD1_1: 27.113,44.518 31.153,44.518 31.153,36.767 27.113,36.767
  region net +13.8V: 11.799,23.051 16.331,23.051 16.331,14.066 11.799,14.066
  region net LED: 32.093,39.684 62.202,39.684 62.202,27.3 32.093,27.3
  region net +13.8V: 1.458,23.051 16.331,23.051 16.331,19.39 1.458,19.39
Bottom Layer:
  region net HeatSink: 44.5,7.3 44.5,47.3 84.5,47.3 84.5,7.3

## Silkscreen, mask and mechanical layers (free items; w line width, h text height)
Top Overlay:
  circle w0.254: c64.5,27.3 r19
  text "OpenVLC_TX_2.1.3_B" at 58.531,50.944 h0.8
  text "IMDEA Networks" at 58.531,49.512 h0.8
  text "SIG" at 33.752,48.052 h0.5
  text "GND" at 36.256,48.052 h0.5
  text "GND" at 23.53,32.188 h0.5
  text "+" at 59.834,28.704 h1
  text "GND" at 68.438,26.123 h0.5 r270
  text "LED" at 34.877,24.959 h0.5
  text "DISABLE" at 11.964,22.072 h0.5
  text "ENABLE" at 15.752,22.072 h0.5
  text "13.8V" at 2.1,8.35 h0.5
  text "GND" at 5,8.35 h0.5
  text "GND" at 30.634,4.953 h0.5 r270
Bottom Overlay:
  text "GND" at 5.628,43.867 h0.5 r270
  text "+5V" at 49.2,4.4 h0.5 r270
  text "GND" at 49.2,1.947 h0.5 r270
Mechanical 1:
  the board outline again, w0.254

## Text inside footprints (layer, text, board x,y; h text height)
C2A: Top Overlay "+" at 2.014,26.114 h1.2 r180